# Altium PCB PCB1.PcbDoc
Units mm, origin at the board's own origin, x right, y up, seen from the top; angles counter-clockwise.
Board outline 95 x 95 mm, 2 copper layers (Top Layer, Bottom Layer); 52 components, 0 nets, 144 pads, 13 vias.
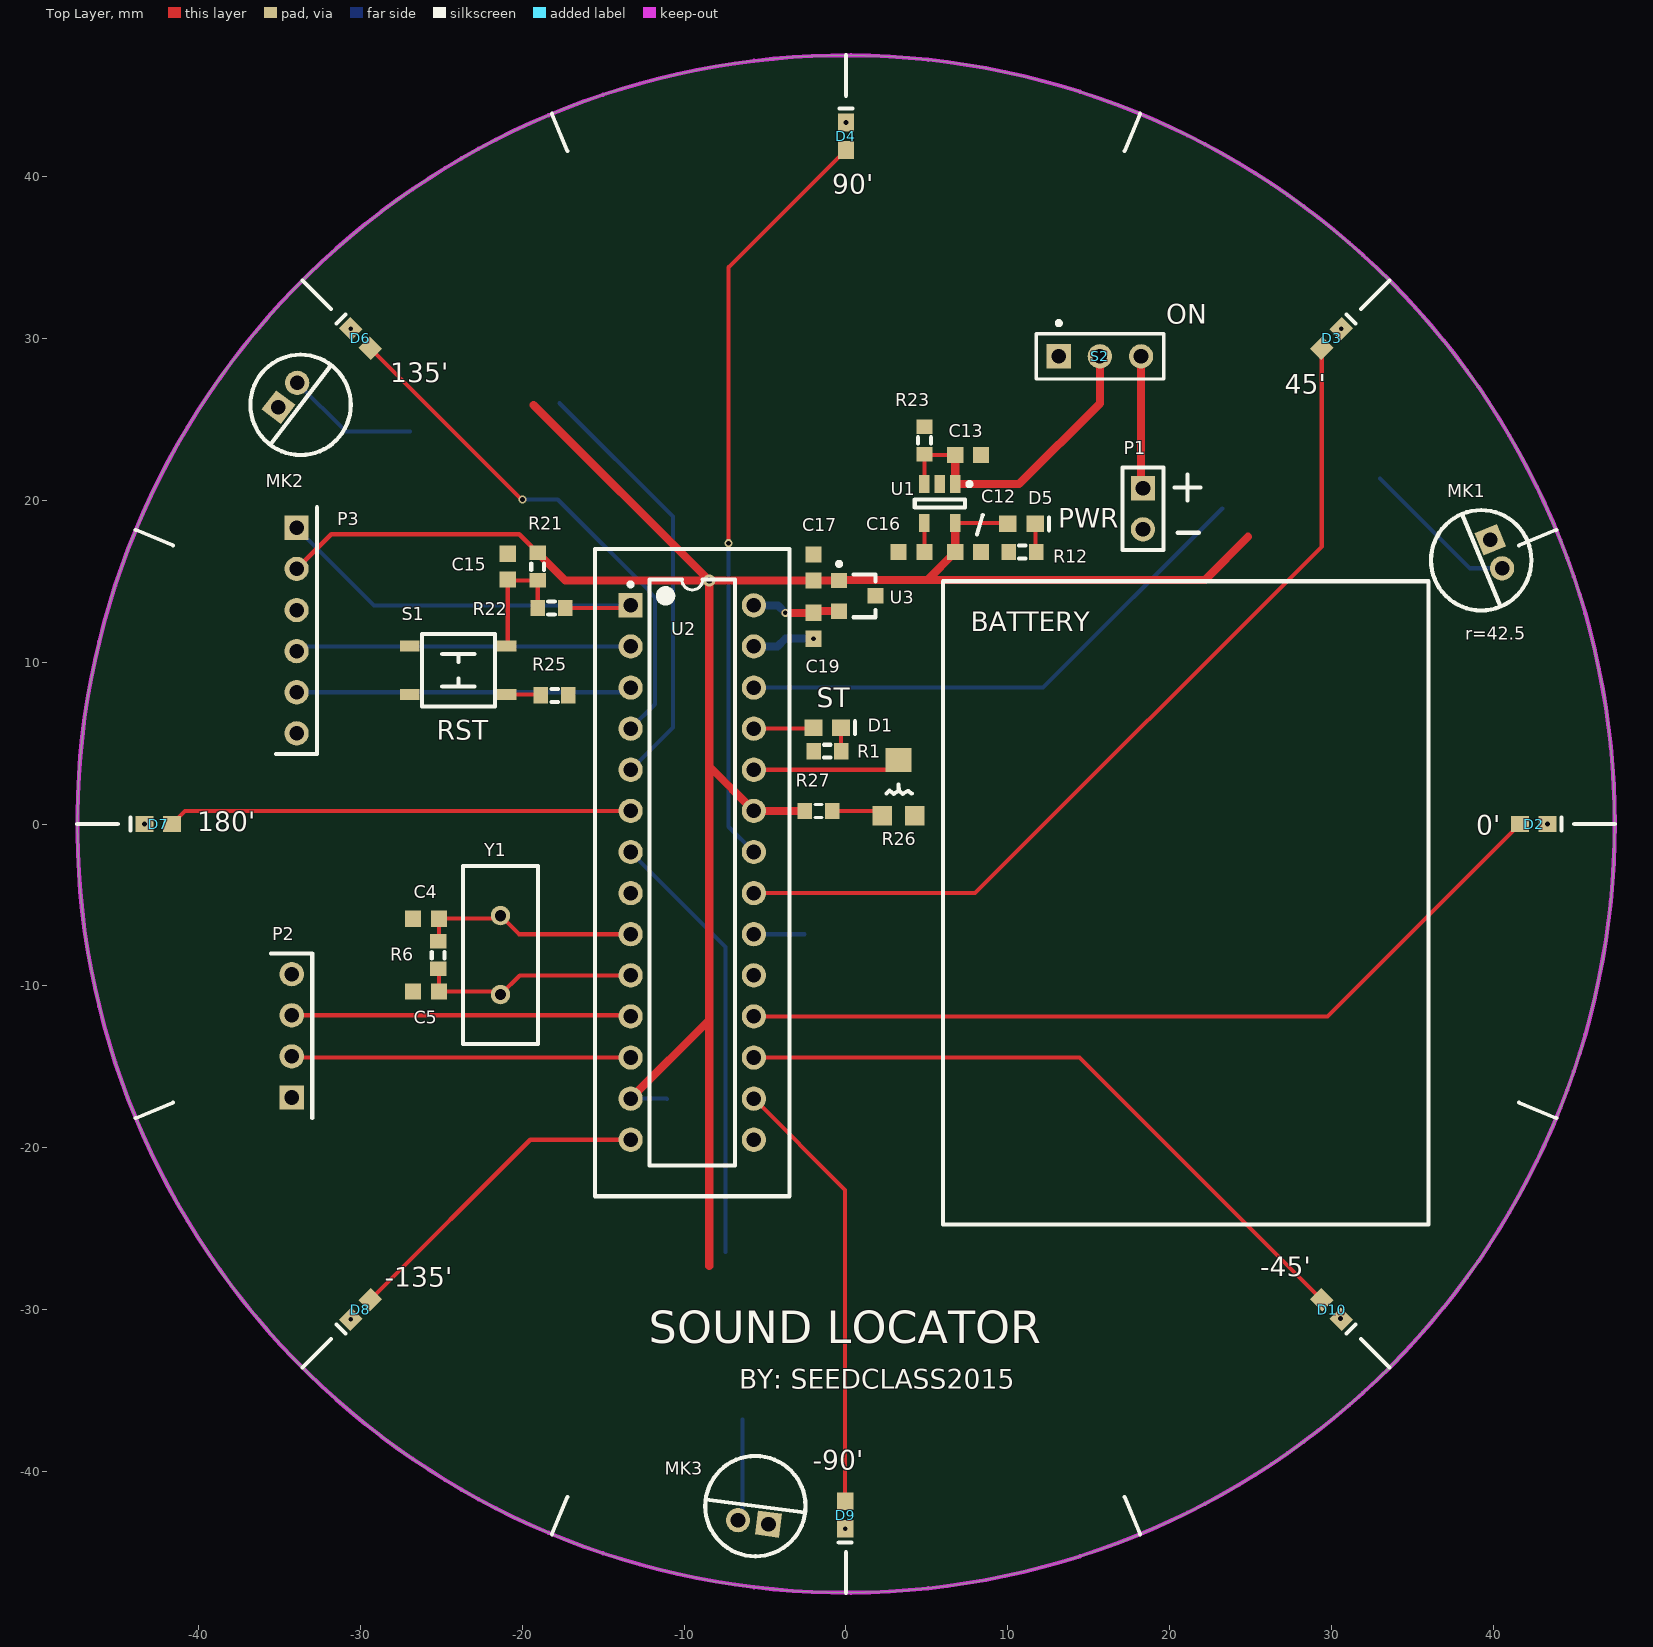
[diagram p0: Top Layer view]
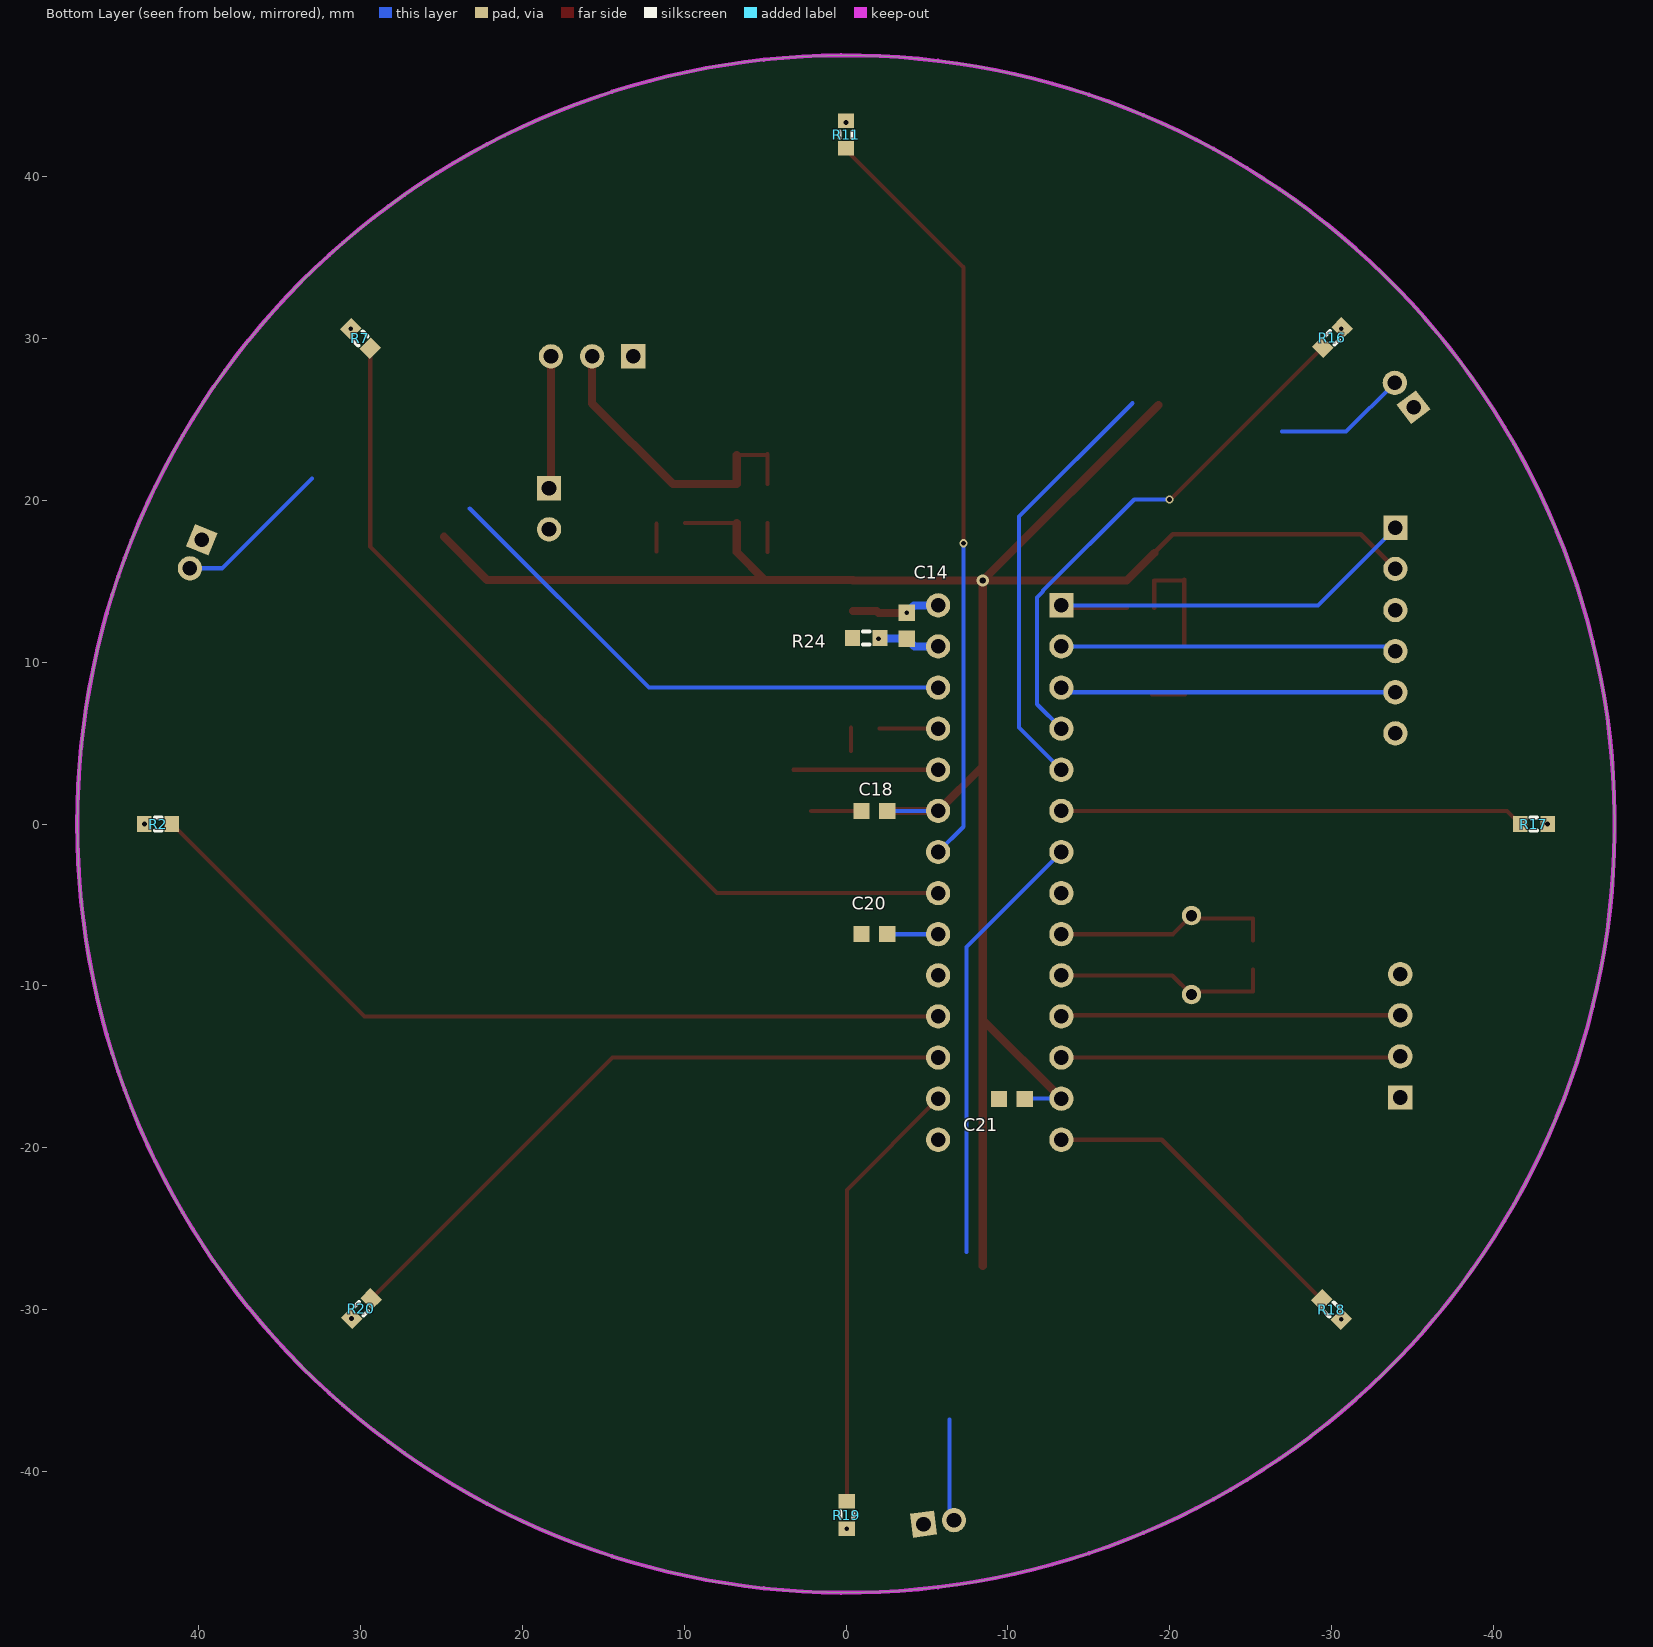
[diagram p1: Bottom Layer view, seen from below]

## Layer stack, top to bottom
Top Solder: solder mask 0.0102, Solder Resist, Dk 3.5
Top Layer: signal copper 0.0356
Dielectric 1: dielectric 0.32, FR-4, Dk 4.8
Bottom Layer: signal copper 0.0356
Bottom Solder: solder mask 0.0102, Solder Resist, Dk 3.5

## Board outline
0,-47.5 cw(c0,0) -47.5,0 cw(c0,0) 0,47.5 cw(c0,0) 47.5,0 cw(c0,0)

## Design rules (kind name [scope] priority, off if disabled: settings)
Clearance [All] p1: gap=0.254
ComponentClearance [All] p1 off: gap=0.254 collisioncheckmode=3 verticalgap=0.254 showdistances=FALSE
MinimumSolderMaskSliver [All] p1 off: minsoldermaskwidth=0.254
PolygonConnect [All] p1: connectstyle=Relief reliefconductorwidth=0.254 reliefentries=4 polygonreliefangle="90 Angle" airgapwidth=0.254
RoomDefinition top [InComponentClass('top')] p1: confinementstyle=ConfineIn formatcopy=TRUE lockcomponents=FALSE outline -61.95,-50.75 74.5,-50.75 74.5,52.25 -61.95,52.25
RoutingVias [All] p1: holewidth=0.3 width=0.5 viastyle="Through Hole" minholewidth=0.3 minwidth=0.5 maxholewidth=3.2 maxwidth=6
SilkToBoardRegionClearance [All] p1 off:
SilkToSilkClearance [All] p1 off: silktosilkclearance=0.254
SilkToSolderMaskClearance [IsPad] p1 off: minsilkscreentomaskgap=0.254 clearancetoexposedcopper=TRUE
SolderMaskExpansion [All] p1: expansion=0.102
Width [All] p1: maxlimit=1 minlimit=0.2 preferedwidth=0.2 minimp=50.000000 maximp=50.000000 favimp=50.000000
25 further rules are at their usual default settings.

## Components (designator, comment, footprint, x,y, rotation, side; value= is the part's Value field where it differs from the comment)
C4 "Ta" CAPC1608N -25.95,-5.85 r180 top
C5 "Ta" CAPC1608N -25.95,-10.35 r180 top
C12 "Cap" CAPC1608N 7.55,16.8 r180 top
C13 "Cap" CAPC1608N 7.55,22.8 r0 top
C14 "Cap" CAPC1608N -3.75,12.25 r270 bottom
C15 "Cap" CAPC1608N -20.9,15.9 r90 top
C16 "Cap" CAPC1608N 4.05,16.8 r0 top
C17 "Cap" CAPC1608N -2,15.85 r270 top
C18 "Cap" CAPC1608N -1.75,0.8 r0 bottom
C19 "Cap" CAPC1608N -2,12.25 r90 top
C20 "Cap" CAPC1608N -1.75,-6.8 r180 bottom
C21 "Cap" CAPC1608N -10.25,-17 r0 bottom
D1 "LED2" CD1608-0603 -1.15,5.95 r0 top
D2 "LED2" CD1608-0603 42.5,0 r0 top
D3 "LED2" CD1608-0603 30,30 r45 top
D4 "LED2" CD1608-0603 0,42.5 r90 top
D5 "LED2" CD1608-0603 10.85,18.55 r0 top
D6 "LED2" CD1608-0603 -30,30 r135 top
D7 "LED2" CD1608-0603 -42.5,0 r180 top
D8 "LED2" CD1608-0603 -30,-30 r225 top
D9 "LED2" CD1608-0603 -0.05,-42.7 r270 top
D10 "LED2" CD1608-0603 30,-30 r315 top
MK1 "Mic2" MK 39.25,16.295 r292.5 top
MK2 "Mic2" MK -33.7,25.9 r52.5 top
MK3 "Mic2" MK -5.6,-42.15 r172.5 top
P1 "source" HDR1X2 18.35,20.75 r270 top
P2 "uart" HDR1X4 -34.25,-16.9 r90 top
P3 "icsp" HDR1X6 -33.95,18.3 r270 top
R1 "Res1" RESC1608N -1.15,4.5 r0 top
R2 "Res1" RESC1608N 42.5,0 r0 bottom
R6 "Res1" RESC1608N -25.2,-8.1 r270 top
R7 "Res1" RESC1608N 30,30 r45 bottom
R11 "Res1" RESC1608N 0,42.6 r90 bottom
R12 "Res1" RESC1608N 10.9,16.8 r0 top
R16 "Res1" RESC1608N -30.05,30.05 r135 bottom
R17 "Res1" RESC1608N -42.5,0 r180 bottom
R18 "Res1" RESC1608N -30,-30 r225 bottom
R19 "Res1" RESC1608N -0.05,-42.7 r270 bottom
R20 "Res1" RESC1608N 29.95,-29.95 r315 bottom
R21 "Res1" RESC1608N -19.05,15.9 r90 top
R22 "Res1" RESC1608N -18.2,13.35 r180 top
R23 "Res1" RESC1608N 4.85,23.7 r270 top
R24 "Res1" RESC1608N -1.25,11.5 r0 bottom
R25 "Res1" RESC1608N -18,7.95 r180 top
R26 "RPot" RPOT 3.25,2.3 r0 top
R27 "Res1" RESC1608N -1.7,0.8 r180 top
S1 "SW-SPST" sw -23.95,9.5 r180 top
S2 "SW-SPST" PIN3 13.15,28.9 r0 top
U1 "rt9193-33GB" SOT23-5_N 5.8,19.8 r270 top
U2 "pic32mx250f128b-SPDIP" DIP-28 -9.5,-3 r0 top
U3 "ref3325-SOT23-3" SOT23-3 0.7,14.1 r270 top
Y1 "XTAL" XTAL -21.35,-8.1 r90 top

## Footprints (in the part's own frame and the unit in brackets; to place one, negate y for a bottom-side part, rotate by r counter-clockwise, add the part's x,y. Pads: shape width x height; smd on the part's side, far side on the other; paste and mask are expansions set on the pad)
CAPC1608N [mm] "Chip Capacitor, Body 1.6x0.8mm, IPC Medium Density"
  rect 1x1 smd: 1(-0.8,0) 2(0.8,0)
  body extent -0.87,-0.48 0.87,0.48, height 0.85
CD1608-0603 [mm] "Chip Diode; Body 1.6 x 0.8 mm (LxW typ)"
  rect 1.1x1 smd: 1(-0.85,0) 2(0.85,0)
  silkscreen extent 1.7,-0.4 1.7,0.4
DIP-28 [mm] "DIP, 28-Pin, Row Spacing 7.62 mm, Pitch 2.54 mm"
  rect 1.5x1.5 hole 0.9: 1(-3.81,16.51)
  round 1.5 hole 0.9: 2(-3.81,13.97) 3(-3.81,11.43) 4(-3.81,8.89) 5(-3.81,6.35) 6(-3.81,3.81) 7(-3.81,1.27) 8(-3.81,-1.27) 9(-3.81,-3.81) 10(-3.81,-6.35) 11(-3.81,-8.89) 12(-3.81,-11.43) 13(-3.81,-13.97) 14(-3.81,-16.51) 15(3.81,-16.51) 16(3.81,-13.97) 17(3.81,-11.43) 18(3.81,-8.89) 19(3.81,-6.35) 20(3.81,-3.81) 21(3.81,-1.27) 22(3.81,1.27) 23(3.81,3.81) 24(3.81,6.35) 25(3.81,8.89) 26(3.81,11.43) 27(3.81,13.97) 28(3.81,16.51)
  silkscreen extent -3.93,-18.1 2.65,18.1, body extent -3.55,-18.1 3.55,18.1, height 5.33
HDR1X2 [mm] "Connector; Header; 2 Position"
  rect 1.5x1.5 hole 0.9: 1(0,0)
  round 1.5 hole 0.9: 2(2.54,0)
  silkscreen extent -1.27,-1.27 3.81,1.27
HDR1X4 [mm] "Connector; Header; 4 Position"
  rect 1.5x1.5 hole 0.9: 1(0,0)
  round 1.5 hole 0.9: 2(2.54,0) 3(5.08,0) 4(7.62,0)
  silkscreen extent -1.27,-1.27 8.89,1.27
HDR1X6 [mm] "Connector; Header; 6 Position"
  rect 1.5x1.5 hole 0.9: 1(0,0)
  round 1.5 hole 0.9: 2(2.54,0) 3(5.08,0) 4(7.62,0) 5(10.16,0) 6(12.7,0)
  silkscreen extent -1.27,-1.27 13.97,1.27
MK [mm]
  rect 1.5x1.5 hole 0.9: 1(-0.95,1)
  round 1.5 hole 0.9: 2(0.95,1)
  silkscreen extent -3.1,-3.1 3.1,3.1
PIN3 [mm]
  rect 1.5x1.5 hole 0.9: 1(0,0)
  oval 1.51x1.5 hole 0.9: 2(2.54,0)
  round 1.5 hole 0.9: 3(5.08,0)
  silkscreen extent -1.4,-1.4 6.48,2.17
RESC1608N [mm] "Chip Resistor, Body 1.6x0.8mm, IPC Medium Density"
  rect 0.9x1 smd: 1(-0.85,0) 2(0.85,0)
  silkscreen extent -0.2,-0.4 0.2,0.4, body extent -0.85,-0.48 0.85,0.48, height 0.6
RPOT [mm]
  rect 1.2x1.2 smd: 1(1,-1.8) 3(-1,-1.8)
  rect 1.6x1.5 smd: 2(0,1.65)
  silkscreen extent -0.74,-0.43 0.81,0.14
SOT23-3 [mm] "SOT-23; 3 Leads; Body 3.0 x 2.5 mm, inc. leads (LxW max)"
  rect 0.95x1 smd: 1(-0.95,-1.125) 2(0.95,-1.125) 3(0,1.125)
  silkscreen extent -2.1,-1.25 1.32,1.13
SOT23-5_N [mm] "SOT23, 5-Leads, Body 2.9x1.6mm, Pitch 0.95mm, Lead Span 2.8mm, IPC Medium Density"
  rect 1.1x0.65 smd: 1(-1.2,0.95) 2(-1.2,0) 3(-1.2,-0.95) 4(1.2,-0.95) 5(1.2,0.95)
  silkscreen extent -1.32,-1.55 0.25,1.95, body extent -0.9,-1.55 0.9,1.55, height 1.4
sw [mm]
  rect 1.2x0.7 smd: 1(-3,1.5) 2(-3,-1.5) 3(3,-1.5) 4(3,1.5)
  silkscreen extent -2.25,-2.25 2.25,2.25
XTAL [mm]
  round 1.2 hole 0.7: 1(-2.44,0) 2(2.44,0)
  silkscreen extent -5.5,-2.32 5.5,2.32

## Part data
C4 C5: library part Cap, "Capacitor"
C12 C13 C14 C15 C16 C17 C18 C19 C20 C21: "Capacitor"
D1 D2 D3 D4 D5 D6 D7 D8 D9 D10: "Typical RED, GREEN, YELLOW, AMBER GaAs LED"
MK1 MK2 MK3: "Microphone"
P1: library part "Header 2", "Header, 2-Pin"
P2: library part "Header 4", "Header, 4-Pin"
P3: library part "Header 6", "Header, 6-Pin"
R1 R2 R6 R7 R11 R12 R16 R17 R18 R19 R20 R21 R22 R23 R24 R25 R27: "Resistor"
R26: "Potentiometer"
S1 S2: "Single-Pole, Single-Throw Switch"
U1: library part rt9193, "rt9193"
U2: library part pic32mx250f128b
U3: library part ref33xx, "ref33xx"
Y1: "Crystal Oscillator"

## Via types
v1: diameter 0.5, hole 0.3, Top Layer to Bottom Layer, 12 vias
v2: diameter 0.762, hole 0.381, Top Layer to Bottom Layer, 1 vias

## Nets (pads, with @x,y where several pads share a name; then routed paths per layer and width w, separated by ;. In a path a pad name is that pad's centre, name@x,y a point inside that pad or via, vN(x,y) a via of type N, cw(c..) or ccw(c..) an arc to the next point about the centre after c; other vN are vias at no path point)
pads on no net: C4.1 C4.2 C5.1 C5.2 C12.1 C12.2 C13.1 C13.2 C14.1 C14.2 C15.1 C15.2 C16.1 C16.2 C17.1 C17.2 C18.1 C18.2 C19.1 C19.2 C20.1 C20.2 C21.1 C21.2 D1.1 D1.2 D2.1 D2.2 D3.1 D3.2 D4.1 D4.2 D5.1 D5.2 D6.1 D6.2 D7.1 D7.2 D8.1 D8.2 D9.1 D9.2 D10.1 D10.2 MK1.1 MK1.2 MK2.1 MK2.2 MK3.1 MK3.2 P1.1 P1.2 P2.1 P2.2 P2.3 P2.4 P3.1 P3.2 P3.3 P3.4 P3.5 P3.6 R1.1 R1.2 R2.1 R2.2 R6.1 R6.2 R7.1 R7.2 R11.1 R11.2 R12.1 R12.2 R16.1 R16.2 R17.1 R17.2 R18.1 R18.2 R19.1 R19.2 R20.1 R20.2 R21.1 R21.2 R22.1 R22.2 R23.1 R23.2 R24.1 R24.2 R25.1 R25.2 R26.1 R26.2 R26.3 R27.1 R27.2 S1.1 S1.2 S1.3 S1.4 S2.1 S2.2 S2.3 U1.1 U1.2 U1.3 U1.4 U1.5 U2.1 U2.2 U2.3 U2.4 U2.5 U2.6 U2.7 U2.8 U2.9 U2.10 U2.11 U2.12 U2.13 U2.14 U2.15 U2.16 U2.17 U2.18 U2.19 U2.20 U2.21 U2.22 U2.23 U2.24 U2.25 U2.26 U2.27 U2.28 U3.1 U3.2 U3.3 Y1.1 Y1.2
copper on no net: | length 771
  Top Layer w0.254: -41.65,0 -40.84,0.81 -13.31,0.81 ; -34.25,-11.82 -13.38,-11.82 ; -34.18,-14.43 -13.31,-14.43 ; -29.399,-29.399 -19.51,-19.51 -13.31,-19.51 ; -29.399,29.399 -20.05,20.05 v1(-20,20.05) ; -25.15,-9 -25.15,-10.35 -21.54,-10.35 ; -25.15,-7.2 -25.15,-5.85 -21.54,-5.85 ; -21.35,-10.54 -20.16,-9.35 -13.31,-9.35 ; -21.35,-5.66 -20.2,-6.81 -13.31,-6.81 ; -20.95,8 -18.9,8 ; -20.95,11 -20.9,11.05 -20.9,15.1 -20.85,15.05 -19.05,15.05 -19.05,13.35 ; -17.35,13.35 -13.47,13.35 -13.31,13.51 ; v1(-7.25,17.35) -7.25,34.4 0,41.65 ; -5.69,-16.97 -0.05,-22.61 -0.05,-41.85 ; -5.69,-14.43 14.43,-14.43 29.399,-29.399 ; -5.69,-11.89 29.76,-11.89 41.65,0 ; -5.69,-4.27 7.98,-4.27 29.399,17.149 29.399,29.399 ; -5.69,3.35 3.25,3.35 ; -5.69,5.89 -2.06,5.89 ; -0.85,0.8 2.15,0.8 ; -0.3,4.5 -0.3,5.95 ; 4.85,16.8 4.85,18.6 ; 4.85,21 4.85,22.85 ; 4.9,22.8 6.75,22.8 ; 6.75,18.6 9.95,18.6 ; 11.7,16.85 11.7,18.55
  Top Layer w0.3: -33.95,15.76 -31.81,17.9 -20.2,17.9 -19.05,16.75 ; -21.35,-5.66 -21.1,-5.66
  Top Layer w0.5: -19.3,25.9 v2(-8.45,15.05) ; -19.05,16.75 -17.35,15.05 v2(-8.45,15.05) ; -13.31,-16.97 -8.45,-12.11 ; -8.45,-27.3 -8.45,-12.11 ; v1(-3.75,13.05) -2,13.05 ; -2.56,0.81 -5.69,0.81 -8.45,3.57 ; -1.9,13.15 -0.425,13.15 ; 6.75,18.6 6.75,16.8 5.029,15.079 ; 6.75,22.8 6.75,21 10.7,21 15.69,25.99 15.69,28.9 ; 18.23,20.87 18.23,28.9 ; 24.85,17.75 22.179,15.079 5.029,15.079 ; -8.45,-12.11 -8.45,3.57 ; -8.45,3.57 v2(-8.45,15.05) ; v2(-8.45,15.05) -2,15.05 -0.425,15.05 -0.425,15.079 5.029,15.079
  Bottom Layer w0.254: -33.95,8.14 -13.6,8.14 -13.31,8.43 ; -33.95,10.68 -33.66,10.97 -13.31,10.97 ; -33.95,18.3 -29.16,13.51 -13.31,13.51 ; -33.915,27.262 -30.903,24.25 -26.95,24.25 ; v1(-20,20.05) -17.811,20.05 -12.179,14.418 -12.179,14.38 -11.8,14.001 -11.8,7.4 -13.31,5.89 ; -17.7,26 -10.7,19 -10.7,5.96 -13.31,3.35 ; -13.31,-16.97 -11.08,-16.97 -11.05,-17 ; -13.31,-1.73 -7.45,-7.59 -7.45,-26.444 ; v1(-7.25,17.35) -7.25,-0.17 -5.69,-1.73 ; -6.672,-43.017 -6.4,-42.745 -6.4,-36.8 ; -5.69,-6.81 -2.56,-6.81 ; -5.69,8.43 12.18,8.43 23.25,19.5 ; -5.68,0.8 -2.55,0.8 ; 33,21.35 38.55,15.8 40.537,15.8
  Bottom Layer w0.5: -5.69,10.97 -4.23,10.97 -3.75,11.45 v1(-2,11.45) ; -5.69,13.51 -4.21,13.51 v1(-3.75,13.05)
  other v1: -0.05,-43.55 -30.601,-30.601 30.551,-30.551 -43.35,0 43.35,0 -30.601,30.601 30.601,30.601 0,43.35

## Keep-outs
Keep-Out Layer:
  circle w0.254: c0,0 r47.5

## Silkscreen, mask and mechanical layers (free items; w line width, h text height)
Top Overlay:
  lines w0.254: -43.884,-18.177 -41.575,-17.221 ; -43.884,18.177 -41.575,17.221 ; -18.177,-43.884 -17.221,-41.575 ; -18.177,43.884 -17.221,41.575 ; 8.1,17.9 8.45,19.1 ; 17.221,-41.575 18.177,-43.884 ; 17.221,41.575 18.177,43.884 ; 20.3,20.8 21.9,20.8 ; 20.5,18 21.8,18 ; 21.1,20 21.1,21.6 ; 41.575,-17.221 43.884,-18.177 ; 45,0 47.5,0 ; -47.5,0 -45,0 -47.5,0 ; -33.588,-33.588 -31.82,-31.82 -33.588,-33.588 ; -33.588,33.588 -31.82,31.82 -33.588,33.588 ; -15.5,-23 -15.5,17 -3.5,17 -3.5,-21.75 -3.5,-23 -15.5,-23 ; 0,-47.5 0,-45 0,-47.5 ; 0,45 0,47.5 0,45 ; 6,-24.75 36,-24.75 36,15 6,15 6,-24.75 ; 31.82,-31.82 33.588,-33.588 31.82,-31.82 ; 31.82,31.82 33.588,33.588 31.82,31.82 ; 41.575,17.221 43.884,18.177 41.575,17.221
  text "90'" at -0.85,38.95 h1.2
  text "ON" at 19.8,30.9 h1.2
  text "135'" at -28.15,27.3 h1.2
  text "45'" at 27.1,26.6 h1.2
  text "PWR" at 13.1,18.3 h1.2
  text "BATTERY" at 7.7,11.9 h1.2
  text "r=42.5" at 38.25,11.4 h0.8
  text "ST" at -1.8,7.2 h1.2
  text "RST" at -25.3,5.2 h1.2
  text "180'" at -40.1,-0.45 h1.2
  text "0'" at 38.95,-0.65 h1.2
  text "-45'" at 25.6,-27.95 h1.2
  text "-135'" at -28.5,-28.6 h1.2
  text "SOUND LOCATOR" at -12.2,-32.1 h2
  text "BY: SEEDCLASS2015" at -6.6,-34.9 h1.2
  text "-90'" at -2.05,-39.9 h1.2
Bottom Overlay:
  circle w0.254: c-82.664,-82.178 r3